# Allegro board pc049a_lemo_db_05.brd
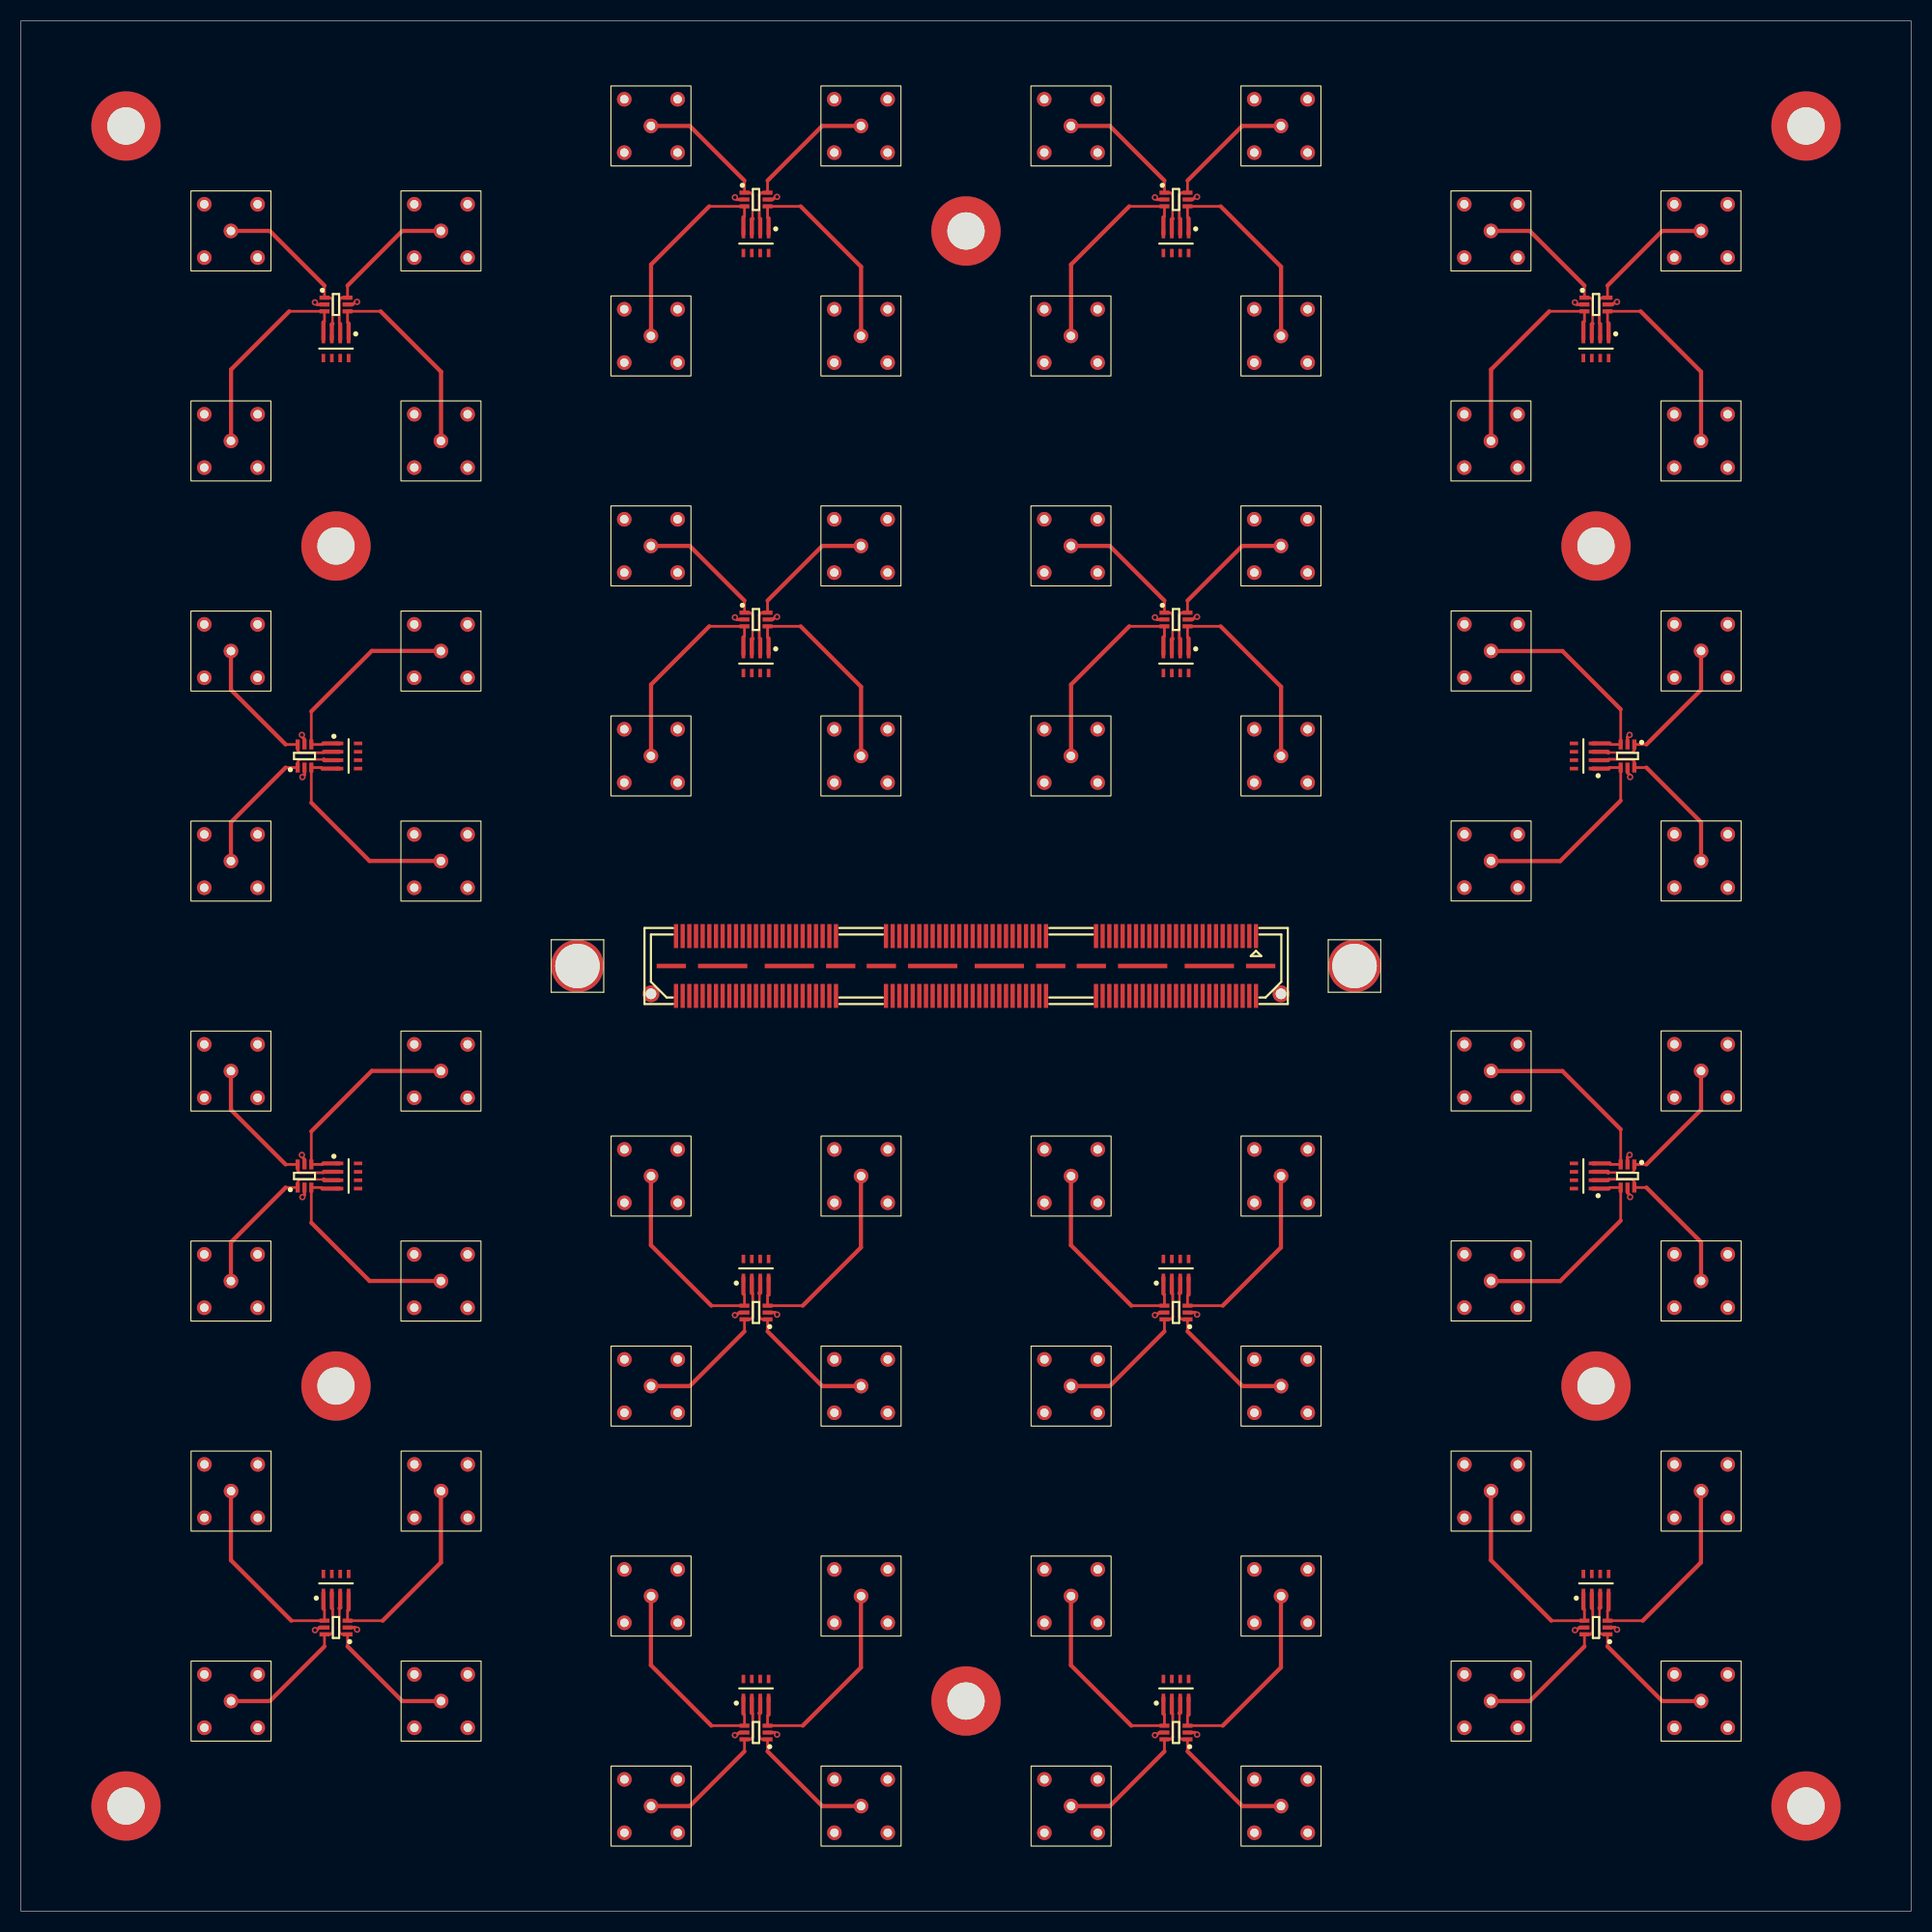
[diagram p0: board, top side]
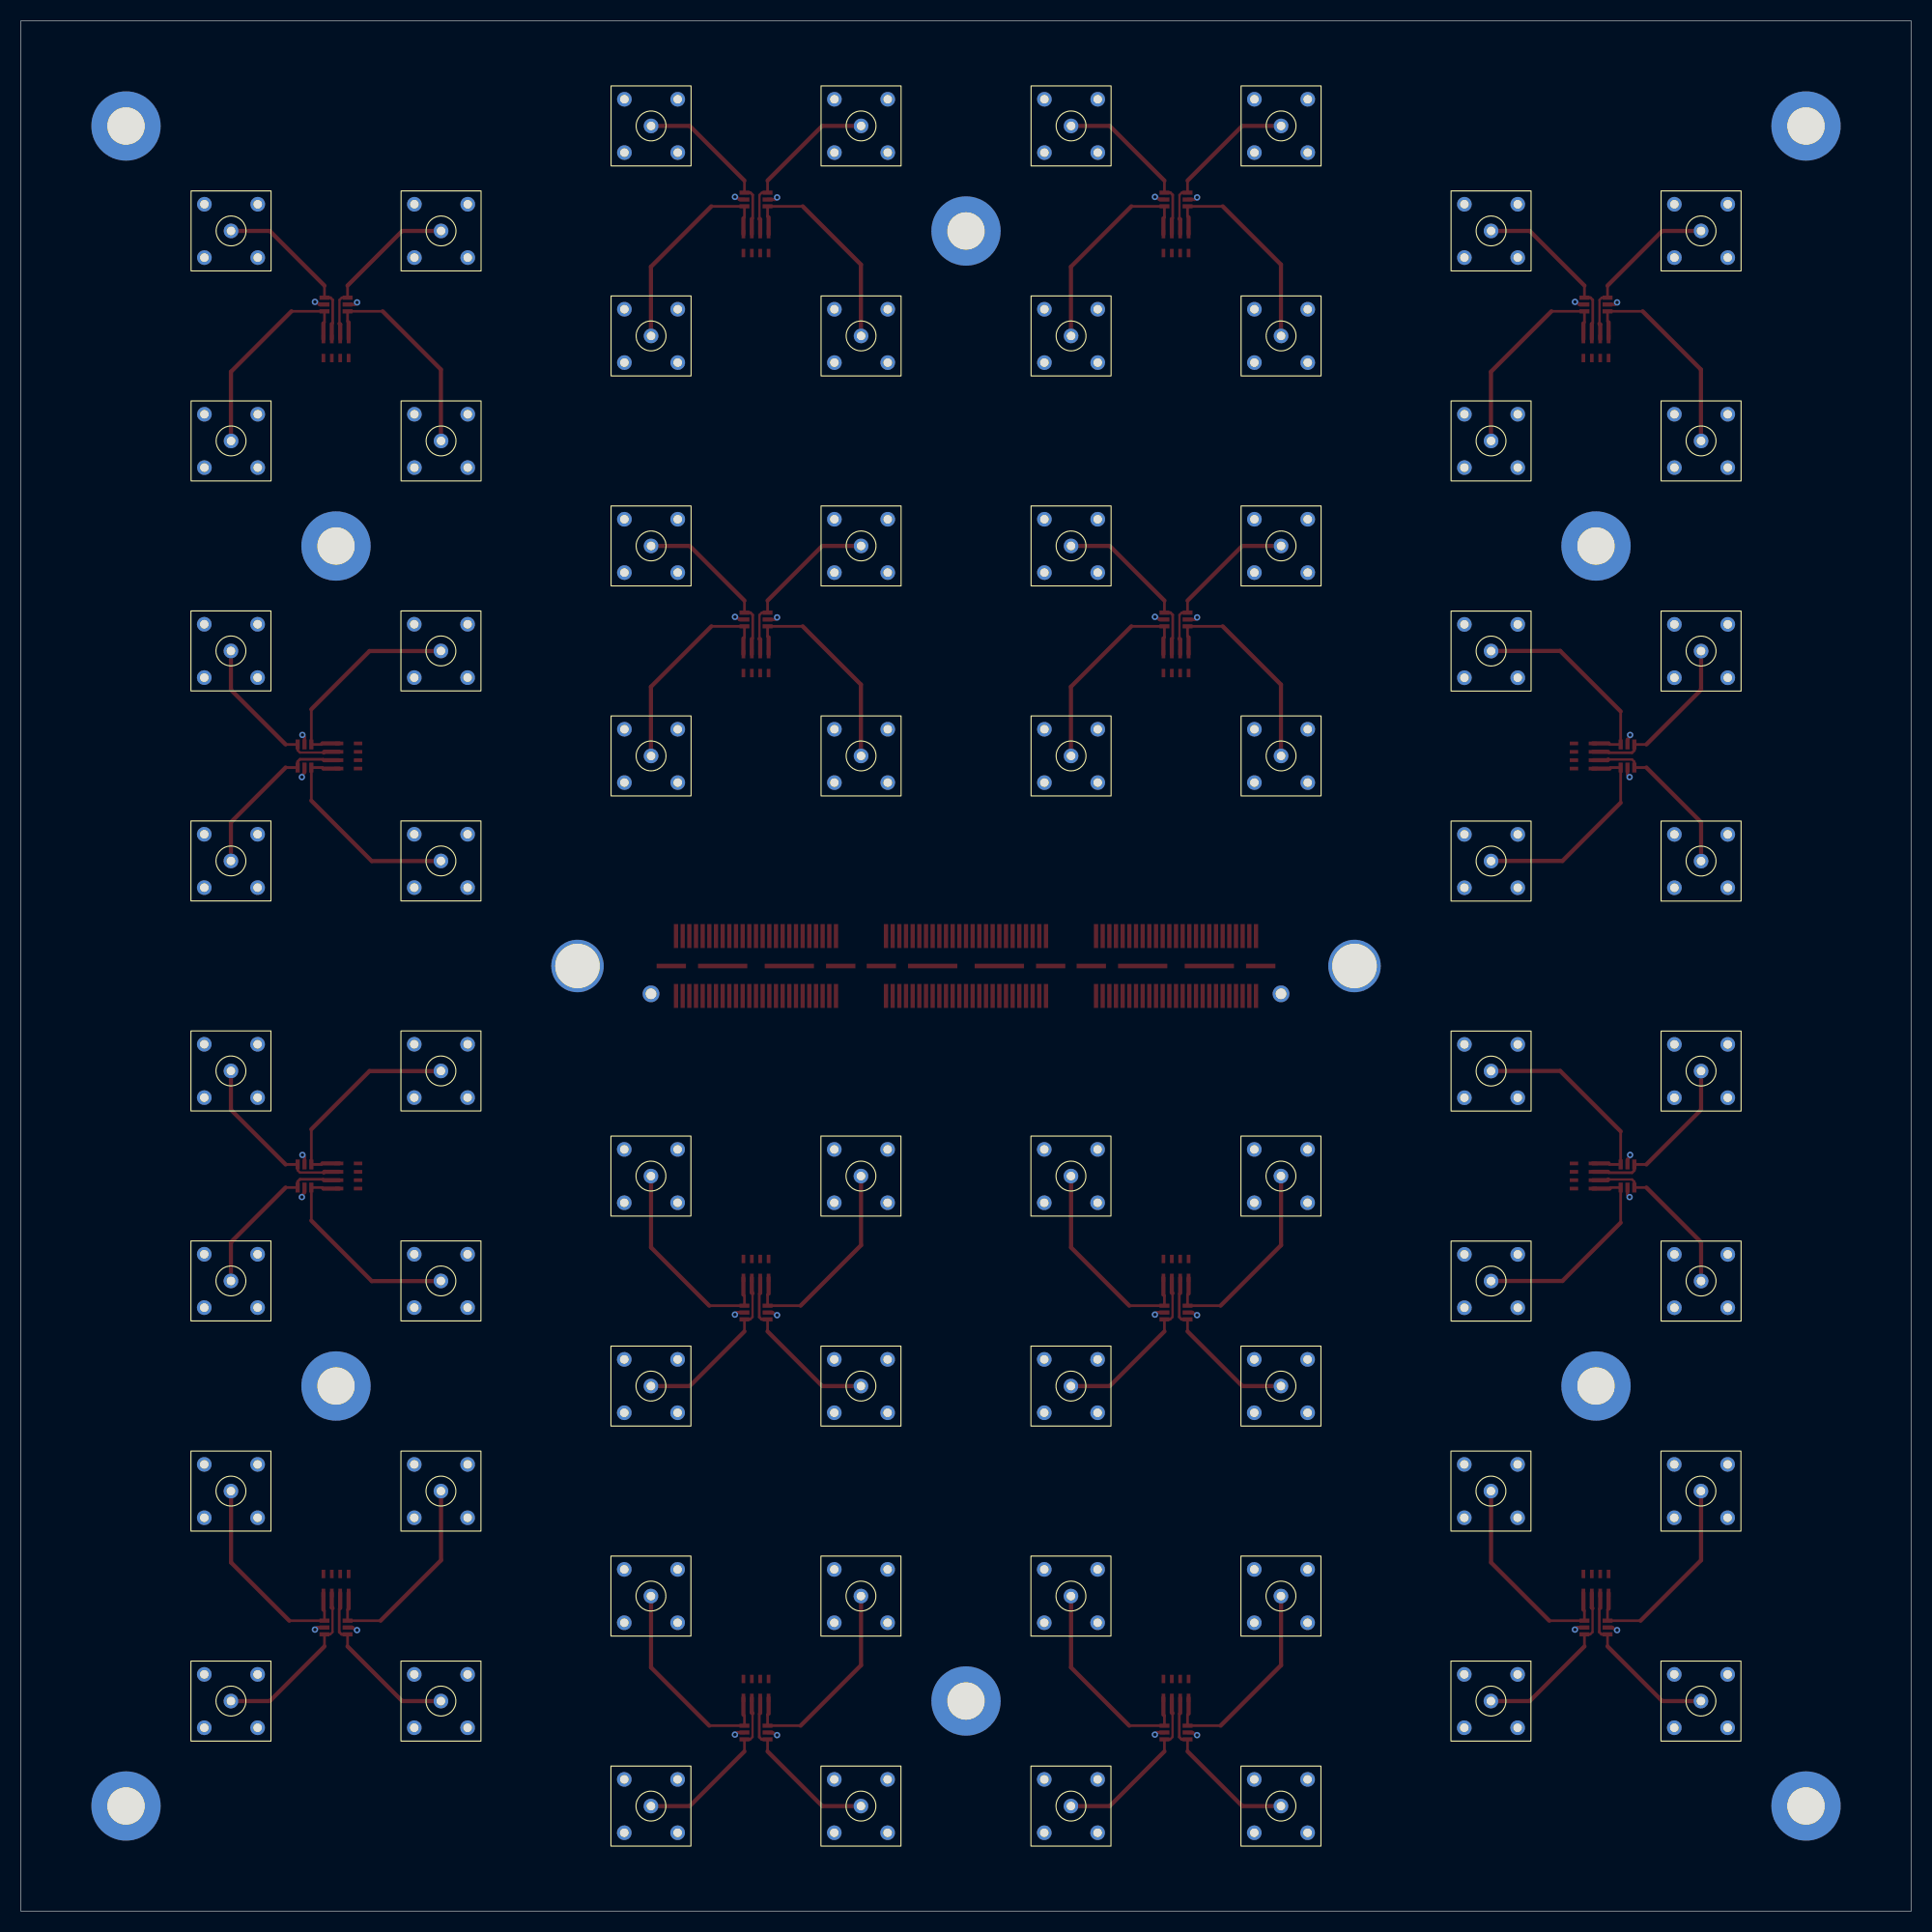
[diagram p1: board, bottom side, seen from below]

Outline 180 x 180 mm; copper layers: TOP, L2, L3, BOTTOM. Coordinates in mm from the lower left corner of the outline.
Outline path: 0,180 180,180 180,0 0,0 0,180

## Design rules (mm)
net group ANALOG_TO_MAROC: nets ANALOG_TO_MAROC<0> ANALOG_TO_MAROC<1> ANALOG_TO_MAROC<2> ANALOG_TO_MAROC<3> ANALOG_TO_MAROC<4> ANALOG_TO_MAROC<5> ANALOG_TO_MAROC<6> ANALOG_TO_MAROC<7> ANALOG_TO_MAROC<8> ANALOG_TO_MAROC<9> ANALOG_TO_MAROC<10> ANALOG_TO_MAROC<11> ANALOG_TO_MAROC<12> ANALOG_TO_MAROC<13> ANALOG_TO_MAROC<14> ANALOG_TO_MAROC<15> ANALOG_TO_MAROC<16> ANALOG_TO_MAROC<17> ANALOG_TO_MAROC<18> ANALOG_TO_MAROC<19> ANALOG_TO_MAROC<20> ANALOG_TO_MAROC<21> ANALOG_TO_MAROC<22> ANALOG_TO_MAROC<23> ANALOG_TO_MAROC<24> ANALOG_TO_MAROC<25> ANALOG_TO_MAROC<26> ANALOG_TO_MAROC<27> ANALOG_TO_MAROC<28> ANALOG_TO_MAROC<29> ANALOG_TO_MAROC<30> ANALOG_TO_MAROC<31> ANALOG_TO_MAROC<32> ANALOG_TO_MAROC<33> ANALOG_TO_MAROC<34> ANALOG_TO_MAROC<35> ANALOG_TO_MAROC<36> ANALOG_TO_MAROC<37> ANALOG_TO_MAROC<38> ANALOG_TO_MAROC<39> ANALOG_TO_MAROC<40> ANALOG_TO_MAROC<41> ANALOG_TO_MAROC<42> ANALOG_TO_MAROC<43> ANALOG_TO_MAROC<44> ANALOG_TO_MAROC<45> ANALOG_TO_MAROC<46> ANALOG_TO_MAROC<47> ANALOG_TO_MAROC<48> ANALOG_TO_MAROC<49> ANALOG_TO_MAROC<50> ANALOG_TO_MAROC<51> ANALOG_TO_MAROC<52> ANALOG_TO_MAROC<53> ANALOG_TO_MAROC<54> ANALOG_TO_MAROC<55> ANALOG_TO_MAROC<56> ANALOG_TO_MAROC<57> ANALOG_TO_MAROC<58> ANALOG_TO_MAROC<59> ANALOG_TO_MAROC<60> ANALOG_TO_MAROC<61> ANALOG_TO_MAROC<62> ANALOG_TO_MAROC<63>

## Placement (name value [footprint] x y rotation side)
CN1_1  100nF/16V  [CAPCAF80P160X320X110-8N]  31.2 70 0 top
CN1_2  100nF/16V  [CAPCAF80P160X320X110-8N]  30 31.2 90 top
CN1_3  100nF/16V  [CAPCAF80P160X320X110-8N]  70 61.2 90 top
CN1_4  100nF/16V  [CAPCAF80P160X320X110-8N]  70 21.2 90 top
CN1_5  100nF/16V  [CAPCAF80P160X320X110-8N]  110 21.2 90 top
CN1_6  100nF/16V  [CAPCAF80P160X320X110-8N]  110 61.2 90 top
CN1_7  100nF/16V  [CAPCAF80P160X320X110-8N]  148.8 70 180 top
CN1_8  100nF/16V  [CAPCAF80P160X320X110-8N]  150 31.2 90 top
CN1_9  100nF/16V  [CAPCAF80P160X320X110-8N]  148.8 110 180 top
CN1_10  100nF/16V  [CAPCAF80P160X320X110-8N]  150 148.8 270 top
CN1_11  100nF/16V  [CAPCAF80P160X320X110-8N]  110 158.8 270 top
CN1_12  100nF/16V  [CAPCAF80P160X320X110-8N]  110 118.8 270 top
CN1_13  100nF/16V  [CAPCAF80P160X320X110-8N]  70 158.8 270 top
CN1_14  100nF/16V  [CAPCAF80P160X320X110-8N]  70 118.8 270 top
CN1_15  100nF/16V  [CAPCAF80P160X320X110-8N]  31.2 110 0 top
CN1_16  100nF/16V  [CAPCAF80P160X320X110-8N]  30 148.8 270 top
D1_1  -  [SOT65P210X110-6N]  27 70 90 top
D1_2  -  [SOT65P210X110-6N]  30 27 180 top
D1_3  -  [SOT65P210X110-6N]  70 57 180 top
D1_4  -  [SOT65P210X110-6N]  70 17 180 top
D1_5  -  [SOT65P210X110-6N]  110 17 180 top
D1_6  -  [SOT65P210X110-6N]  110 57 180 top
D1_7  -  [SOT65P210X110-6N]  153 70 270 top
D1_8  -  [SOT65P210X110-6N]  150 27 180 top
D1_9  -  [SOT65P210X110-6N]  153 110 270 top
D1_10  -  [SOT65P210X110-6N]  150 153 0 top
D1_11  -  [SOT65P210X110-6N]  110 163 0 top
D1_12  -  [SOT65P210X110-6N]  110 123 0 top
D1_13  -  [SOT65P210X110-6N]  70 163 0 top
D1_14  -  [SOT65P210X110-6N]  70 123 0 top
D1_15  -  [SOT65P210X110-6N]  27 110 90 top
D1_16  -  [SOT65P210X110-6N]  30 153 0 top
J1  -  [CON150_QSSDA]  117.62 92.85 270 top
LK*  -  [unnamed]  53 90 0 top
LK*#2  -  [unnamed]  127 90 0 top
NOREF  -  [unnamed#2]  170 10 0 top
NOREF#2  -  [#3]  0 0 90 top
NOREF#3  -  [unnamed#2]  90 160 0 top
NOREF#4  -  [unnamed#2]  150 50 0 top
NOREF#5  -  [unnamed#2]  30 130 0 top
NOREF#6  -  [unnamed#2]  90 20 0 top
NOREF#7  -  [#3]  0 180 0 top
NOREF#8  -  [unnamed#2]  170 170 0 top
NOREF#9  -  [#3]  -130 -130 0 top
NOREF#10  -  [unnamed#2]  150 130 0 top
NOREF#11  -  [unnamed#2]  10 10 0 top
NOREF#12  -  [unnamed#2]  10 170 0 top
NOREF#13  -  [unnamed#2]  30 50 0 top
PX1_1  -  [PLEMOD80]  40 60 270 bottom
PX1_2  -  [PLEMOD80]  40 40 0 bottom
PX1_3  -  [PLEMOD80]  80 70 0 bottom
PX1_4  -  [PLEMOD80]  80 30 0 bottom
PX1_5  -  [PLEMOD80]  120 30 0 bottom
PX1_6  -  [PLEMOD80]  120 70 0 bottom
PX1_7  -  [PLEMOD80]  140 80 90 bottom
PX1_8  -  [PLEMOD80]  160 40 0 bottom
PX1_9  -  [PLEMOD80]  140 120 90 bottom
PX1_10  -  [PLEMOD80]  140 140 180 bottom
PX1_11  -  [PLEMOD80]  100 150 180 bottom
PX1_12  -  [PLEMOD80]  100 110 180 bottom
PX1_13  -  [PLEMOD80]  60 150 180 bottom
PX1_14  -  [PLEMOD80]  60 110 180 bottom
PX1_15  -  [PLEMOD80]  40 100 270 bottom
PX1_16  -  [PLEMOD80]  20 140 180 bottom
PX2_1  -  [PLEMOD80]  20 60 270 bottom
PX2_2  -  [PLEMOD80]  40 20 0 bottom
PX2_3  -  [PLEMOD80]  80 50 0 bottom
PX2_4  -  [PLEMOD80]  80 10 0 bottom
PX2_5  -  [PLEMOD80]  120 10 0 bottom
PX2_6  -  [PLEMOD80]  120 50 0 bottom
PX2_7  -  [PLEMOD80]  160 80 90 bottom
PX2_8  -  [PLEMOD80]  160 20 0 bottom
PX2_9  -  [PLEMOD80]  160 120 90 bottom
PX2_10  -  [PLEMOD80]  140 160 180 bottom
PX2_11  -  [PLEMOD80]  100 170 180 bottom
PX2_12  -  [PLEMOD80]  100 130 180 bottom
PX2_13  -  [PLEMOD80]  60 170 180 bottom
PX2_14  -  [PLEMOD80]  60 130 180 bottom
PX2_15  -  [PLEMOD80]  20 100 270 bottom
PX2_16  -  [PLEMOD80]  20 160 180 bottom
PX3_1  -  [PLEMOD80]  20 80 270 bottom
PX3_2  -  [PLEMOD80]  20 20 0 bottom
PX3_3  -  [PLEMOD80]  60 50 0 bottom
PX3_4  -  [PLEMOD80]  60 10 0 bottom
PX3_5  -  [PLEMOD80]  100 10 0 bottom
PX3_6  -  [PLEMOD80]  100 50 0 bottom
PX3_7  -  [PLEMOD80]  160 60 90 bottom
PX3_8  -  [PLEMOD80]  140 20 0 bottom
PX3_9  -  [PLEMOD80]  160 100 90 bottom
PX3_10  -  [PLEMOD80]  160 160 180 bottom
PX3_11  -  [PLEMOD80]  120 170 180 bottom
PX3_12  -  [PLEMOD80]  120 130 180 bottom
PX3_13  -  [PLEMOD80]  80 170 180 bottom
PX3_14  -  [PLEMOD80]  80 130 180 bottom
PX3_15  -  [PLEMOD80]  20 120 270 bottom
PX3_16  -  [PLEMOD80]  40 160 180 bottom
PX4_1  -  [PLEMOD80]  40 80 270 bottom
PX4_2  -  [PLEMOD80]  20 40 0 bottom
PX4_3  -  [PLEMOD80]  60 70 0 bottom
PX4_4  -  [PLEMOD80]  60 30 0 bottom
PX4_5  -  [PLEMOD80]  100 30 0 bottom
PX4_6  -  [PLEMOD80]  100 70 0 bottom
PX4_7  -  [PLEMOD80]  140 60 90 bottom
PX4_8  -  [PLEMOD80]  140 40 0 bottom
PX4_9  -  [PLEMOD80]  140 100 90 bottom
PX4_10  -  [PLEMOD80]  160 140 180 bottom
PX4_11  -  [PLEMOD80]  120 150 180 bottom
PX4_12  -  [PLEMOD80]  120 110 180 bottom
PX4_13  -  [PLEMOD80]  80 150 180 bottom
PX4_14  -  [PLEMOD80]  80 110 180 bottom
PX4_15  -  [PLEMOD80]  40 120 270 bottom
PX4_16  -  [PLEMOD80]  40 140 180 bottom

## Library data of the parts
CN1_1-CN1_16 = CAPN4I: part number: CAPN4I-100NF,16V,X7R,CKCA43
D1_1-D1_16 = PRTR5V0U4Y
J1 = CON150P: part number: CON150P-QSS75_01FDA
PX1_1-PX1_16 PX2_1-PX2_16 PX3_1-PX3_16 PX4_1-PX4_16 = COAX: part number: COAX-PLEMO00D

## Footprints (pads in the part's own frame, mm; a bottom-side part is the same pattern mirrored in y, then rotated)
CAPCAF80P160X320X110-8N
  rect 0.8x0.35 smd: 1(-0.9,1.2) 2(0.9,1.2) 3(-0.9,0.4) 4(0.9,0.4) 5(-0.9,-0.4) 6(0.9,-0.4) 7(-0.9,-1.2) 8(0.9,-1.2)
CON150_QSSDA
  round 1.6 hole 1.016: (5.5,2.38) (5.5,-57.62)
  rect 2.286x0.406 smd: 1(0,0) 2(5.7,0) 3(0,-0.635) 4(5.7,-0.635) 5(0,-1.27) 6(5.7,-1.27) 7(0,-1.905) 8(5.7,-1.905) 9(0,-2.54) 10(5.7,-2.54) 11(0,-3.175) 12(5.7,-3.175) 13(0,-3.81) 14(5.7,-3.81) 15(0,-4.445) 16(5.7,-4.445) 17(0,-5.08) 18(5.7,-5.08) 19(0,-5.715) 20(5.7,-5.715) 21(0,-6.35) 22(5.7,-6.35) 23(0,-6.985) 24(5.7,-6.985) 25(0,-7.62) 26(5.7,-7.62) 27(0,-8.255) 28(5.7,-8.255) 29(0,-8.89) 30(5.7,-8.89) 31(0,-9.525) 32(5.7,-9.525) 33(0,-10.16) 34(5.7,-10.16) 35(0,-10.795) 36(5.7,-10.795) 37(0,-11.43) 38(5.7,-11.43) 39(0,-12.065) 40(5.7,-12.065) 41(0,-12.7) 42(5.7,-12.7) 43(0,-13.335) 44(5.7,-13.335) 45(0,-13.97) 46(5.7,-13.97) 47(0,-14.605) 48(5.7,-14.605) 49(0,-15.24) 50(5.7,-15.24) 51(0,-20) 52(5.7,-20) 53(0,-20.635) 54(5.7,-20.635) 55(0,-21.27) 56(5.7,-21.27) 57(0,-21.905) 58(5.7,-21.905) 59(0,-22.54) 60(5.7,-22.54) 61(0,-23.175) 62(5.7,-23.175) 63(0,-23.81) 64(5.7,-23.81) 65(0,-24.445) 66(5.7,-24.445) 67(0,-25.08) 68(5.7,-25.08) 69(0,-25.715) 70(5.7,-25.715) 71(0,-26.35) 72(5.7,-26.35) 73(0,-26.985) 74(5.7,-26.985) 75(0,-27.62) 76(5.7,-27.62) 77(0,-28.255) 78(5.7,-28.255) 79(0,-28.89) 80(5.7,-28.89) 81(0,-29.525) 82(5.7,-29.525) 83(0,-30.16) 84(5.7,-30.16) 85(0,-30.795) 86(5.7,-30.795) 87(0,-31.43) 88(5.7,-31.43) 89(0,-32.065) 90(5.7,-32.065) 91(0,-32.7) 92(5.7,-32.7) 93(0,-33.335) 94(5.7,-33.335) 95(0,-33.97) 96(5.7,-33.97) 97(0,-34.605) 98(5.7,-34.605) 99(0,-35.24) 100(5.7,-35.24) 101(0,-40) 102(5.7,-40) 103(0,-40.635) 104(5.7,-40.635) 105(0,-41.27) 106(5.7,-41.27) 107(0,-41.905) 108(5.7,-41.905) 109(0,-42.54) 110(5.7,-42.54) 111(0,-43.175) 112(5.7,-43.175) 113(0,-43.81) 114(5.7,-43.81) 115(0,-44.445) 116(5.7,-44.445) 117(0,-45.08) 118(5.7,-45.08) 119(0,-45.715) 120(5.7,-45.715) 121(0,-46.35) 122(5.7,-46.35) 123(0,-46.985) 124(5.7,-46.985) 125(0,-47.62) 126(5.7,-47.62) 127(0,-48.255) 128(5.7,-48.255) 129(0,-48.89) 130(5.7,-48.89) 131(0,-49.525) 132(5.7,-49.525) 133(0,-50.16) 134(5.7,-50.16) 135(0,-50.795) 136(5.7,-50.795) 137(0,-51.43) 138(5.7,-51.43) 139(0,-52.065) 140(5.7,-52.065) 141(0,-52.7) 142(5.7,-52.7) 143(0,-53.335) 144(5.7,-53.335) 145(0,-53.97) 146(5.7,-53.97) 147(0,-54.605) 148(5.7,-54.605) 149(0,-55.24) 150(5.7,-55.24)
  rect 0.432x2.794 smd: 151(2.85,0.445) 154(2.85,-15.685) 155(2.85,-19.555) 158(2.85,-35.685) 159(2.85,-39.555) 162(2.85,-55.685)
  rect 0.432x4.699 smd: 152(2.85,-4.445) 153(2.85,-10.795) 156(2.85,-24.445) 157(2.85,-30.795) 160(2.85,-44.445) 161(2.85,-50.795)
PLEMOD80
  round 1.397 hole 0.813: 1(0.006,0.007) 2(-2.534,-2.533) 3(2.546,-2.533) 4(2.546,2.547) 5(-2.534,2.547)
SOT65P210X110-6N
  rect 0.95x0.4 smd: 1(-1.1,0.65) 2(-1.1,0) 3(-1.1,-0.65) 4(1.1,-0.65) 5(1.1,0) 6(1.1,0.65)
unnamed
  round 5 hole 4.24 unplated: (0,0)
unnamed#2
  round 6.604 hole 3.556: 1(0,0)

## Nets
AVDD: J1.147(A<146>) J1.148(A<147>) J1.149(A<148>) J1.150(A<149>)
GND_SIGNAL: D1_1.2(GND) D1_1.5(VCC) D1_2.2(GND) D1_2.5(VCC) D1_3.2(GND) D1_3.5(VCC) D1_4.2(GND) D1_4.5(VCC) D1_5.2(GND) D1_5.5(VCC) D1_6.2(GND) D1_6.5(VCC) D1_7.2(GND) D1_7.5(VCC) D1_8.2(GND) D1_8.5(VCC) D1_9.2(GND) D1_9.5(VCC) D1_10.2(GND) D1_10.5(VCC) D1_11.2(GND) D1_11.5(VCC) D1_12.2(GND) D1_12.5(VCC) D1_13.2(GND) D1_13.5(VCC) D1_14.2(GND) D1_14.5(VCC) D1_15.2(GND) D1_15.5(VCC) D1_16.2(GND) D1_16.5(VCC) J1.1(A<0>) J1.4(A<3>) J1.5(A<4>) J1.8(A<7>) J1.9(A<8>) J1.12(A<11>) J1.13(A<12>) J1.16(A<15>) J1.17(A<16>) J1.20(A<19>) J1.21(A<20>) J1.24(A<23>) J1.25(A<24>) J1.28(A<27>) J1.29(A<28>) J1.32(A<31>) J1.33(A<32>) J1.36(A<35>) J1.37(A<36>) J1.40(A<39>) J1.41(A<40>) J1.44(A<43>) J1.45(A<44>) J1.48(A<47>) J1.49(A<48>) J1.52(A<51>) J1.53(A<52>) J1.56(A<55>) J1.57(A<56>) J1.60(A<59>) J1.61(A<60>) J1.64(A<63>) J1.65(A<64>) J1.68(A<67>) J1.69(A<68>) J1.72(A<71>) J1.73(A<72>) J1.76(A<75>) J1.77(A<76>) J1.80(A<79>) J1.81(A<80>) J1.84(A<83>) J1.85(A<84>) J1.88(A<87>) J1.89(A<88>) J1.92(A<91>) J1.93(A<92>) J1.96(A<95>) J1.97(A<96>) J1.100(A<99>) J1.101(A<100>) J1.104(A<103>) J1.105(A<104>) J1.108(A<107>) J1.109(A<108>) J1.112(A<111>) J1.113(A<112>) J1.116(A<115>) J1.117(A<116>) J1.120(A<119>) J1.121(A<120>) J1.124(A<123>) J1.125(A<124>) J1.128(A<127>) J1.129(A<128>) J1.132(A<131>) J1.133(A<132>) J1.136(A<135>) J1.137(A<136>) J1.140(A<139>) J1.141(A<140>) J1.144(A<143>) J1.145(A<144>) J1.146(A<145>) PX1_1.2(B<0>) PX1_1.3(B<1>) PX1_1.4(B<2>) PX1_1.5(B<3>) PX1_2.2(B<0>) PX1_2.3(B<1>) PX1_2.4(B<2>) PX1_2.5(B<3>) PX1_3.2(B<0>) PX1_3.3(B<1>) PX1_3.4(B<2>) PX1_3.5(B<3>) PX1_4.2(B<0>) PX1_4.3(B<1>) PX1_4.4(B<2>) PX1_4.5(B<3>) PX1_5.2(B<0>) PX1_5.3(B<1>) PX1_5.4(B<2>) PX1_5.5(B<3>) PX1_6.2(B<0>) PX1_6.3(B<1>) PX1_6.4(B<2>) PX1_6.5(B<3>) PX1_7.2(B<0>) PX1_7.3(B<1>) PX1_7.4(B<2>) PX1_7.5(B<3>) PX1_8.2(B<0>) PX1_8.3(B<1>) PX1_8.4(B<2>) PX1_8.5(B<3>) PX1_9.2(B<0>) PX1_9.3(B<1>) PX1_9.4(B<2>) PX1_9.5(B<3>) PX1_10.2(B<0>) PX1_10.3(B<1>) PX1_10.4(B<2>) PX1_10.5(B<3>) PX1_11.2(B<0>) PX1_11.3(B<1>) PX1_11.4(B<2>) PX1_11.5(B<3>) PX1_12.2(B<0>) PX1_12.3(B<1>) PX1_12.4(B<2>) PX1_12.5(B<3>) PX1_13.2(B<0>) PX1_13.3(B<1>) PX1_13.4(B<2>) PX1_13.5(B<3>) PX1_14.2(B<0>) PX1_14.3(B<1>) PX1_14.4(B<2>) PX1_14.5(B<3>) PX1_15.2(B<0>) PX1_15.3(B<1>) PX1_15.4(B<2>) PX1_15.5(B<3>) PX1_16.2(B<0>) PX1_16.3(B<1>) PX1_16.4(B<2>) PX1_16.5(B<3>) PX2_1.2(B<0>) PX2_1.3(B<1>) PX2_1.4(B<2>) PX2_1.5(B<3>) PX2_2.2(B<0>) PX2_2.3(B<1>) PX2_2.4(B<2>) PX2_2.5(B<3>) PX2_3.2(B<0>) PX2_3.3(B<1>) PX2_3.4(B<2>) PX2_3.5(B<3>) PX2_4.2(B<0>) PX2_4.3(B<1>) PX2_4.4(B<2>) PX2_4.5(B<3>) PX2_5.2(B<0>) PX2_5.3(B<1>) PX2_5.4(B<2>) PX2_5.5(B<3>) PX2_6.2(B<0>) PX2_6.3(B<1>) PX2_6.4(B<2>) PX2_6.5(B<3>) PX2_7.2(B<0>) PX2_7.3(B<1>) PX2_7.4(B<2>) PX2_7.5(B<3>) PX2_8.2(B<0>) PX2_8.3(B<1>) PX2_8.4(B<2>) PX2_8.5(B<3>) PX2_9.2(B<0>) PX2_9.3(B<1>) PX2_9.4(B<2>) PX2_9.5(B<3>) PX2_10.2(B<0>) PX2_10.3(B<1>) PX2_10.4(B<2>) PX2_10.5(B<3>) PX2_11.2(B<0>) PX2_11.3(B<1>) PX2_11.4(B<2>) PX2_11.5(B<3>) PX2_12.2(B<0>) PX2_12.3(B<1>) PX2_12.4(B<2>) PX2_12.5(B<3>) PX2_13.2(B<0>) PX2_13.3(B<1>) PX2_13.4(B<2>) PX2_13.5(B<3>) PX2_14.2(B<0>) PX2_14.3(B<1>) PX2_14.4(B<2>) PX2_14.5(B<3>) PX2_15.2(B<0>) PX2_15.3(B<1>) PX2_15.4(B<2>) PX2_15.5(B<3>) PX2_16.2(B<0>) PX2_16.3(B<1>) PX2_16.4(B<2>) PX2_16.5(B<3>) PX3_1.2(B<0>) PX3_1.3(B<1>) PX3_1.4(B<2>) PX3_1.5(B<3>) PX3_2.2(B<0>) PX3_2.3(B<1>) PX3_2.4(B<2>) PX3_2.5(B<3>) PX3_3.2(B<0>) PX3_3.3(B<1>) PX3_3.4(B<2>) PX3_3.5(B<3>) PX3_4.2(B<0>) PX3_4.3(B<1>) PX3_4.4(B<2>) PX3_4.5(B<3>) PX3_5.2(B<0>) PX3_5.3(B<1>) PX3_5.4(B<2>) PX3_5.5(B<3>) PX3_6.2(B<0>) PX3_6.3(B<1>) PX3_6.4(B<2>) PX3_6.5(B<3>) PX3_7.2(B<0>) PX3_7.3(B<1>) PX3_7.4(B<2>) PX3_7.5(B<3>) PX3_8.2(B<0>) PX3_8.3(B<1>) PX3_8.4(B<2>) PX3_8.5(B<3>) PX3_9.2(B<0>) PX3_9.3(B<1>) PX3_9.4(B<2>) PX3_9.5(B<3>) PX3_10.2(B<0>) PX3_10.3(B<1>) PX3_10.4(B<2>) PX3_10.5(B<3>) PX3_11.2(B<0>) PX3_11.3(B<1>) PX3_11.4(B<2>) PX3_11.5(B<3>) PX3_12.2(B<0>) PX3_12.3(B<1>) PX3_12.4(B<2>) PX3_12.5(B<3>) PX3_13.2(B<0>) PX3_13.3(B<1>) PX3_13.4(B<2>) PX3_13.5(B<3>) PX3_14.2(B<0>) PX3_14.3(B<1>) PX3_14.4(B<2>) PX3_14.5(B<3>) PX3_15.2(B<0>) PX3_15.3(B<1>) PX3_15.4(B<2>) PX3_15.5(B<3>) PX3_16.2(B<0>) PX3_16.3(B<1>) PX3_16.4(B<2>) PX3_16.5(B<3>) PX4_1.2(B<0>) PX4_1.3(B<1>) PX4_1.4(B<2>) PX4_1.5(B<3>) PX4_2.2(B<0>) PX4_2.3(B<1>) PX4_2.4(B<2>) PX4_2.5(B<3>) PX4_3.2(B<0>) PX4_3.3(B<1>) PX4_3.4(B<2>) PX4_3.5(B<3>) PX4_4.2(B<0>) PX4_4.3(B<1>) PX4_4.4(B<2>) PX4_4.5(B<3>) PX4_5.2(B<0>) PX4_5.3(B<1>) PX4_5.4(B<2>) PX4_5.5(B<3>) PX4_6.2(B<0>) PX4_6.3(B<1>) PX4_6.4(B<2>) PX4_6.5(B<3>) PX4_7.2(B<0>) PX4_7.3(B<1>) PX4_7.4(B<2>) PX4_7.5(B<3>) PX4_8.2(B<0>) PX4_8.3(B<1>) PX4_8.4(B<2>) PX4_8.5(B<3>) PX4_9.2(B<0>) PX4_9.3(B<1>) PX4_9.4(B<2>) PX4_9.5(B<3>) PX4_10.2(B<0>) PX4_10.3(B<1>) PX4_10.4(B<2>) PX4_10.5(B<3>) PX4_11.2(B<0>) PX4_11.3(B<1>) PX4_11.4(B<2>) PX4_11.5(B<3>) PX4_12.2(B<0>) PX4_12.3(B<1>) PX4_12.4(B<2>) PX4_12.5(B<3>) PX4_13.2(B<0>) PX4_13.3(B<1>) PX4_13.4(B<2>) PX4_13.5(B<3>) PX4_14.2(B<0>) PX4_14.3(B<1>) PX4_14.4(B<2>) PX4_14.5(B<3>) PX4_15.2(B<0>) PX4_15.3(B<1>) PX4_15.4(B<2>) PX4_15.5(B<3>) PX4_16.2(B<0>) PX4_16.3(B<1>) PX4_16.4(B<2>) PX4_16.5(B<3>)
ANALOG_TO_MAROC<0>: CN1_7.8(B<0>) J1.2(A<1>)
ANALOG_TO_MAROC<1>: CN1_9.2(B<0>) J1.3(A<2>)
ANALOG_TO_MAROC<2>: CN1_7.6(B<0>) J1.6(A<5>)
ANALOG_TO_MAROC<3>: CN1_9.4(B<0>) J1.7(A<6>)
ANALOG_TO_MAROC<4>: CN1_7.4(B<0>) J1.10(A<9>)
ANALOG_TO_MAROC<5>: CN1_9.6(B<0>) J1.11(A<10>)
ANALOG_TO_MAROC<6>: CN1_7.2(B<0>) J1.14(A<13>)
ANALOG_TO_MAROC<7>: CN1_9.8(B<0>) J1.15(A<14>)
ANALOG_TO_MAROC<8>: CN1_8.8(B<0>) J1.18(A<17>)
ANALOG_TO_MAROC<9>: CN1_10.2(B<0>) J1.19(A<18>)
ANALOG_TO_MAROC<10>: CN1_8.6(B<0>) J1.22(A<21>)
ANALOG_TO_MAROC<11>: CN1_10.4(B<0>) J1.23(A<22>)
ANALOG_TO_MAROC<12>: CN1_8.4(B<0>) J1.26(A<25>)
ANALOG_TO_MAROC<13>: CN1_10.6(B<0>) J1.27(A<26>)
ANALOG_TO_MAROC<14>: CN1_8.2(B<0>) J1.30(A<29>)
ANALOG_TO_MAROC<15>: CN1_10.8(B<0>) J1.31(A<30>)
ANALOG_TO_MAROC<16>: CN1_6.8(B<0>) J1.34(A<33>)
ANALOG_TO_MAROC<17>: CN1_12.2(B<0>) J1.35(A<34>)
ANALOG_TO_MAROC<18>: CN1_6.6(B<0>) J1.38(A<37>)
ANALOG_TO_MAROC<19>: CN1_12.4(B<0>) J1.39(A<38>)
ANALOG_TO_MAROC<20>: CN1_6.4(B<0>) J1.42(A<41>)
ANALOG_TO_MAROC<21>: CN1_12.6(B<0>) J1.43(A<42>)
ANALOG_TO_MAROC<22>: CN1_6.2(B<0>) J1.46(A<45>)
ANALOG_TO_MAROC<23>: CN1_12.8(B<0>) J1.47(A<46>)
ANALOG_TO_MAROC<24>: CN1_5.8(B<0>) J1.50(A<49>)
ANALOG_TO_MAROC<25>: CN1_11.2(B<0>) J1.51(A<50>)
ANALOG_TO_MAROC<26>: CN1_5.6(B<0>) J1.54(A<53>)
ANALOG_TO_MAROC<27>: CN1_11.4(B<0>) J1.55(A<54>)
ANALOG_TO_MAROC<28>: CN1_5.4(B<0>) J1.58(A<57>)
ANALOG_TO_MAROC<29>: CN1_11.6(B<0>) J1.59(A<58>)
ANALOG_TO_MAROC<30>: CN1_5.2(B<0>) J1.62(A<61>)
ANALOG_TO_MAROC<31>: CN1_11.8(B<0>) J1.63(A<62>)
ANALOG_TO_MAROC<32>: CN1_4.8(B<0>) J1.66(A<65>)
ANALOG_TO_MAROC<33>: CN1_13.2(B<0>) J1.67(A<66>)
ANALOG_TO_MAROC<34>: CN1_4.6(B<0>) J1.70(A<69>)
ANALOG_TO_MAROC<35>: CN1_13.4(B<0>) J1.71(A<70>)
ANALOG_TO_MAROC<36>: CN1_4.4(B<0>) J1.74(A<73>)
ANALOG_TO_MAROC<37>: CN1_13.6(B<0>) J1.75(A<74>)
ANALOG_TO_MAROC<38>: CN1_4.2(B<0>) J1.78(A<77>)
ANALOG_TO_MAROC<39>: CN1_13.8(B<0>) J1.79(A<78>)
ANALOG_TO_MAROC<40>: CN1_3.8(B<0>) J1.82(A<81>)
ANALOG_TO_MAROC<41>: CN1_14.2(B<0>) J1.83(A<82>)
ANALOG_TO_MAROC<42>: CN1_3.6(B<0>) J1.86(A<85>)
ANALOG_TO_MAROC<43>: CN1_14.4(B<0>) J1.87(A<86>)
ANALOG_TO_MAROC<44>: CN1_3.4(B<0>) J1.90(A<89>)
ANALOG_TO_MAROC<45>: CN1_14.6(B<0>) J1.91(A<90>)
ANALOG_TO_MAROC<46>: CN1_3.2(B<0>) J1.94(A<93>)
ANALOG_TO_MAROC<47>: CN1_14.8(B<0>) J1.95(A<94>)
ANALOG_TO_MAROC<48>: CN1_2.8(B<0>) J1.98(A<97>)
ANALOG_TO_MAROC<49>: CN1_16.2(B<0>) J1.99(A<98>)
ANALOG_TO_MAROC<50>: CN1_2.6(B<0>) J1.102(A<101>)
ANALOG_TO_MAROC<51>: CN1_16.4(B<0>) J1.103(A<102>)
ANALOG_TO_MAROC<52>: CN1_2.4(B<0>) J1.106(A<105>)
ANALOG_TO_MAROC<53>: CN1_16.6(B<0>) J1.107(A<106>)
ANALOG_TO_MAROC<54>: CN1_2.2(B<0>) J1.110(A<109>)
ANALOG_TO_MAROC<55>: CN1_16.8(B<0>) J1.111(A<110>)
ANALOG_TO_MAROC<56>: CN1_1.8(B<0>) J1.114(A<113>)
ANALOG_TO_MAROC<57>: CN1_15.2(B<0>) J1.115(A<114>)
ANALOG_TO_MAROC<58>: CN1_1.6(B<0>) J1.118(A<117>)
ANALOG_TO_MAROC<59>: CN1_15.4(B<0>) J1.119(A<118>)
ANALOG_TO_MAROC<60>: CN1_1.4(B<0>) J1.122(A<121>)
ANALOG_TO_MAROC<61>: CN1_15.6(B<0>) J1.123(A<122>)
ANALOG_TO_MAROC<62>: CN1_1.2(B<0>) J1.126(A<125>)
ANALOG_TO_MAROC<63>: CN1_15.8(B<0>) J1.127(A<126>)
DBOARD_MISO: J1.131(A<130>)
DBOARD_MISO*: J1.135(A<134>)
DBOARD_MOSI: J1.138(A<137>)
DBOARD_MOSI*: J1.142(A<141>)
DBOARD_SCLK: J1.130(A<129>)
DBOARD_SCLK*: J1.134(A<133>)
DBOARD_SSN: J1.139(A<138>)
DBOARD_SSN*: J1.143(A<142>)
P1: J1.151 J1.152 J1.153 J1.154
P2: J1.155 J1.156 J1.157 J1.158
P3: J1.159 J1.160 J1.161 J1.162
UNNAMED_1_CAPN4I_I10_A_1: CN1_1.1(A<0>) D1_1.4(ESD3) PX4_1.1(A)
UNNAMED_1_CAPN4I_I10_A_1_1: CN1_1.3(A<0>) D1_1.6(ESD4) PX3_1.1(A)
UNNAMED_1_CAPN4I_I10_A_1_2: CN1_2.3(A<0>) D1_2.6(ESD4) PX3_2.1(A)
UNNAMED_1_CAPN4I_I10_A_1_3: CN1_3.3(A<0>) D1_3.6(ESD4) PX3_3.1(A)
UNNAMED_1_CAPN4I_I10_A_1_4: CN1_4.3(A<0>) D1_4.6(ESD4) PX3_4.1(A)
UNNAMED_1_CAPN4I_I10_A_1_5: CN1_5.3(A<0>) D1_5.6(ESD4) PX3_5.1(A)
UNNAMED_1_CAPN4I_I10_A_1_6: CN1_6.3(A<0>) D1_6.6(ESD4) PX3_6.1(A)
UNNAMED_1_CAPN4I_I10_A_1_7: CN1_7.3(A<0>) D1_7.6(ESD4) PX3_7.1(A)
UNNAMED_1_CAPN4I_I10_A_1_8: CN1_8.3(A<0>) D1_8.6(ESD4) PX3_8.1(A)
UNNAMED_1_CAPN4I_I10_A_1_9: CN1_9.3(A<0>) D1_9.6(ESD4) PX3_9.1(A)
UNNAMED_1_CAPN4I_I10_A_1_10: CN1_10.3(A<0>) D1_10.6(ESD4) PX3_10.1(A)
UNNAMED_1_CAPN4I_I10_A_1_11: CN1_11.3(A<0>) D1_11.6(ESD4) PX3_11.1(A)
UNNAMED_1_CAPN4I_I10_A_1_12: CN1_12.3(A<0>) D1_12.6(ESD4) PX3_12.1(A)
UNNAMED_1_CAPN4I_I10_A_1_13: CN1_13.3(A<0>) D1_13.6(ESD4) PX3_13.1(A)
UNNAMED_1_CAPN4I_I10_A_1_14: CN1_14.3(A<0>) D1_14.6(ESD4) PX3_14.1(A)
UNNAMED_1_CAPN4I_I10_A_1_15: CN1_15.3(A<0>) D1_15.6(ESD4) PX3_15.1(A)
UNNAMED_1_CAPN4I_I10_A_1_16: CN1_16.3(A<0>) D1_16.6(ESD4) PX3_16.1(A)
UNNAMED_1_CAPN4I_I10_A_2: CN1_2.1(A<0>) D1_2.4(ESD3) PX4_2.1(A)
UNNAMED_1_CAPN4I_I10_A_2_1: CN1_1.5(A<0>) D1_1.1(ESD1) PX2_1.1(A)
UNNAMED_1_CAPN4I_I10_A_2_2: CN1_2.5(A<0>) D1_2.1(ESD1) PX2_2.1(A)
UNNAMED_1_CAPN4I_I10_A_2_3: CN1_3.5(A<0>) D1_3.1(ESD1) PX2_3.1(A)
UNNAMED_1_CAPN4I_I10_A_2_4: CN1_4.5(A<0>) D1_4.1(ESD1) PX2_4.1(A)
UNNAMED_1_CAPN4I_I10_A_2_5: CN1_5.5(A<0>) D1_5.1(ESD1) PX2_5.1(A)
UNNAMED_1_CAPN4I_I10_A_2_6: CN1_6.5(A<0>) D1_6.1(ESD1) PX2_6.1(A)
UNNAMED_1_CAPN4I_I10_A_2_7: CN1_7.5(A<0>) D1_7.1(ESD1) PX2_7.1(A)
UNNAMED_1_CAPN4I_I10_A_2_8: CN1_8.5(A<0>) D1_8.1(ESD1) PX2_8.1(A)
UNNAMED_1_CAPN4I_I10_A_2_9: CN1_9.5(A<0>) D1_9.1(ESD1) PX2_9.1(A)
UNNAMED_1_CAPN4I_I10_A_2_10: CN1_10.5(A<0>) D1_10.1(ESD1) PX2_10.1(A)
UNNAMED_1_CAPN4I_I10_A_2_11: CN1_11.5(A<0>) D1_11.1(ESD1) PX2_11.1(A)
UNNAMED_1_CAPN4I_I10_A_2_12: CN1_12.5(A<0>) D1_12.1(ESD1) PX2_12.1(A)
UNNAMED_1_CAPN4I_I10_A_2_13: CN1_13.5(A<0>) D1_13.1(ESD1) PX2_13.1(A)
UNNAMED_1_CAPN4I_I10_A_2_14: CN1_14.5(A<0>) D1_14.1(ESD1) PX2_14.1(A)
UNNAMED_1_CAPN4I_I10_A_2_15: CN1_15.5(A<0>) D1_15.1(ESD1) PX2_15.1(A)
UNNAMED_1_CAPN4I_I10_A_2_16: CN1_16.5(A<0>) D1_16.1(ESD1) PX2_16.1(A)
UNNAMED_1_CAPN4I_I10_A_3: CN1_3.1(A<0>) D1_3.4(ESD3) PX4_3.1(A)
UNNAMED_1_CAPN4I_I10_A_3_1: CN1_1.7(A<0>) D1_1.3(ESD2) PX1_1.1(A)
UNNAMED_1_CAPN4I_I10_A_3_2: CN1_2.7(A<0>) D1_2.3(ESD2) PX1_2.1(A)
UNNAMED_1_CAPN4I_I10_A_3_3: CN1_3.7(A<0>) D1_3.3(ESD2) PX1_3.1(A)
UNNAMED_1_CAPN4I_I10_A_3_4: CN1_4.7(A<0>) D1_4.3(ESD2) PX1_4.1(A)
UNNAMED_1_CAPN4I_I10_A_3_5: CN1_5.7(A<0>) D1_5.3(ESD2) PX1_5.1(A)
UNNAMED_1_CAPN4I_I10_A_3_6: CN1_6.7(A<0>) D1_6.3(ESD2) PX1_6.1(A)
UNNAMED_1_CAPN4I_I10_A_3_7: CN1_7.7(A<0>) D1_7.3(ESD2) PX1_7.1(A)
UNNAMED_1_CAPN4I_I10_A_3_8: CN1_8.7(A<0>) D1_8.3(ESD2) PX1_8.1(A)
UNNAMED_1_CAPN4I_I10_A_3_9: CN1_9.7(A<0>) D1_9.3(ESD2) PX1_9.1(A)
UNNAMED_1_CAPN4I_I10_A_3_10: CN1_10.7(A<0>) D1_10.3(ESD2) PX1_10.1(A)
UNNAMED_1_CAPN4I_I10_A_3_11: CN1_11.7(A<0>) D1_11.3(ESD2) PX1_11.1(A)
UNNAMED_1_CAPN4I_I10_A_3_12: CN1_12.7(A<0>) D1_12.3(ESD2) PX1_12.1(A)
UNNAMED_1_CAPN4I_I10_A_3_13: CN1_13.7(A<0>) D1_13.3(ESD2) PX1_13.1(A)
UNNAMED_1_CAPN4I_I10_A_3_14: CN1_14.7(A<0>) D1_14.3(ESD2) PX1_14.1(A)
UNNAMED_1_CAPN4I_I10_A_3_15: CN1_15.7(A<0>) D1_15.3(ESD2) PX1_15.1(A)
UNNAMED_1_CAPN4I_I10_A_3_16: CN1_16.7(A<0>) D1_16.3(ESD2) PX1_16.1(A)
UNNAMED_1_CAPN4I_I10_A_4: CN1_4.1(A<0>) D1_4.4(ESD3) PX4_4.1(A)
UNNAMED_1_CAPN4I_I10_A_5: CN1_5.1(A<0>) D1_5.4(ESD3) PX4_5.1(A)
UNNAMED_1_CAPN4I_I10_A_6: CN1_6.1(A<0>) D1_6.4(ESD3) PX4_6.1(A)
UNNAMED_1_CAPN4I_I10_A_7: CN1_7.1(A<0>) D1_7.4(ESD3) PX4_7.1(A)
UNNAMED_1_CAPN4I_I10_A_8: CN1_8.1(A<0>) D1_8.4(ESD3) PX4_8.1(A)
UNNAMED_1_CAPN4I_I10_A_9: CN1_9.1(A<0>) D1_9.4(ESD3) PX4_9.1(A)
UNNAMED_1_CAPN4I_I10_A_10: CN1_10.1(A<0>) D1_10.4(ESD3) PX4_10.1(A)
UNNAMED_1_CAPN4I_I10_A_11: CN1_11.1(A<0>) D1_11.4(ESD3) PX4_11.1(A)
UNNAMED_1_CAPN4I_I10_A_12: CN1_12.1(A<0>) D1_12.4(ESD3) PX4_12.1(A)
UNNAMED_1_CAPN4I_I10_A_13: CN1_13.1(A<0>) D1_13.4(ESD3) PX4_13.1(A)
UNNAMED_1_CAPN4I_I10_A_14: CN1_14.1(A<0>) D1_14.4(ESD3) PX4_14.1(A)
UNNAMED_1_CAPN4I_I10_A_15: CN1_15.1(A<0>) D1_15.4(ESD3) PX4_15.1(A)
UNNAMED_1_CAPN4I_I10_A_16: CN1_16.1(A<0>) D1_16.4(ESD3) PX4_16.1(A)

Pads without a net: NOREF 1; NOREF#3 1; NOREF#4 1; NOREF#5 1; NOREF#6 1; NOREF#8 1; NOREF#10 1; NOREF#11 1; NOREF#12 1; NOREF#13 1

## Via types
v1: diameter 0.61, hole 0.33, TOP to BOTTOM, 32 vias

## Routing (per net, layer and track width the routed paths; a pad name or vN(x,y) marks a point on that pad's centre or on a via; arc(x,y) is an arc through that point)
GND_SIGNAL: length 32
  TOP w0.3: D1_13.5 71.59,163 71.84,163.25 v1(72,163.25) ; v1(32,153.25) 31.84,153.25 31.59,153 D1_16.5 ; v1(28,26.75) 28.16,26.75 28.41,27 D1_2.5 ; D1_10.2 148.2,153 148,153.2 v1(147.99,153.2) ; v1(72.01,16.8) 72,16.8 71.8,17 D1_4.2 ; D1_12.5 111.59,123 111.84,123.25 v1(112,123.25) ; v1(68,56.75) 68.16,56.75 68.41,57 D1_3.5 ; D1_14.5 71.59,123 71.84,123.25 v1(72,123.25) ; v1(107.99,123.2) 108,123.2 108.2,123 D1_12.2 ; D1_15.2 27,108.2 26.8,108 v1(26.8,107.99) ; D1_1.2 27,68.2 26.8,68 v1(26.8,67.99) ; v1(67.99,163.2) 68,163.2 68.2,163 D1_13.2 ; v1(68,16.75) 68.16,16.75 68.41,17 D1_4.5 ; D1_3.2 71.8,57 72,56.8 v1(72.01,56.8) ; D1_8.5 148.41,27 148.16,26.75 v1(148,26.75) ; D1_5.5 108.41,17 108.16,16.75 v1(108,16.75) ; v1(108,56.75) 108.16,56.75 108.41,57 D1_6.5 ; v1(152,153.25) 151.84,153.25 151.59,153 D1_10.5 ; D1_11.5 111.59,163 111.84,163.25 v1(112,163.25) ; v1(112.01,16.8) 112,16.8 111.8,17 D1_5.2 ; D1_11.2 108.2,163 108,163.2 v1(107.99,163.2) ; v1(27.99,153.2) 28,153.2 28.2,153 D1_16.2 ; D1_15.5 27,111.59 26.75,111.84 v1(26.75,112) ; v1(32.01,26.8) 32,26.8 31.8,27 D1_2.2 ; v1(153.25,108) 153.25,108.16 153,108.41 D1_9.5 ; v1(153.2,72.01) 153.2,72 153,71.8 D1_7.2 ; D1_7.5 153,68.41 153.25,68.16 v1(153.25,68) ; D1_9.2 153,111.8 153.2,112 v1(153.2,112.01) ; D1_1.5 27,71.59 26.75,71.84 v1(26.75,72) ; D1_6.2 111.8,57 112,56.8 v1(112.01,56.8) ; D1_14.2 68.2,123 68,123.2 v1(67.99,123.2) ; D1_8.2 151.8,27 152,26.8 v1(152.01,26.8)
UNNAMED_1_CAPN4I_I10_A_1: length 20.6
  TOP w0.226: PX4_1.1 39.99,80.01
  TOP w0.26: 28.8,71.2 28.7,71.1 D1_1.4 27.65,74.25
  TOP w0.4: 27.65,74.25 33.41,80.01 39.99,80.01 ; CN1_1.1 28.8,71.2
UNNAMED_1_CAPN4I_I10_A_1_1: length 16.9
  TOP w0.226: 26.35,70.65 D1_1.6
  TOP w0.26: 26.35,70.65 26.35,70.53 26.56,70.31 28.77,70.31 28.85,70.4 ; 25.2,71.1 D1_1.6
  TOP w0.4: 19.99,80.01 PX3_1.1 19.99,76.31 25.2,71.1 ; CN1_1.3 28.85,70.4
UNNAMED_1_CAPN4I_I10_A_1_2: length 16.9
  TOP w0.226: 29.35,26.35 D1_2.6
  TOP w0.26: 28.9,25.2 D1_2.6 ; 29.6,28.85 29.69,28.77 29.69,26.56 29.47,26.35 29.35,26.35
  TOP w0.4: 19.99,19.99 PX3_2.1 23.69,19.99 28.9,25.2 ; CN1_2.3 29.6,28.85
UNNAMED_1_CAPN4I_I10_A_1_3: length 16.9
  TOP w0.226: 69.35,56.35 D1_3.6
  TOP w0.26: 68.9,55.2 D1_3.6 ; 69.6,58.86 69.69,58.77 69.69,56.56 69.47,56.35 69.35,56.35
  TOP w0.4: 59.99,49.99 PX3_3.1 63.69,49.99 68.9,55.2 ; CN1_3.3 69.6,58.86
UNNAMED_1_CAPN4I_I10_A_1_4: length 16.9
  TOP w0.226: 69.35,16.35 D1_4.6
  TOP w0.26: 69.6,18.86 69.69,18.77 69.69,16.56 69.47,16.35 69.35,16.35 ; 68.9,15.2 D1_4.6
  TOP w0.4: 68.9,15.2 63.69,9.99 PX3_4.1 59.99,9.99 ; CN1_4.3 69.6,18.86
UNNAMED_1_CAPN4I_I10_A_1_5: length 16.9
  TOP w0.226: 109.35,16.35 D1_5.6
  TOP w0.26: 109.6,18.86 109.69,18.77 109.69,16.56 109.47,16.35 109.35,16.35 ; 108.9,15.2 D1_5.6
  TOP w0.4: 108.9,15.2 103.69,9.99 PX3_5.1 99.99,9.99 ; CN1_5.3 109.6,18.86
UNNAMED_1_CAPN4I_I10_A_1_6: length 16.9
  TOP w0.226: 109.35,56.35 D1_6.6
  TOP w0.26: 109.35,56.35 109.47,56.35 109.69,56.56 109.69,58.77 109.6,58.86 ; 108.9,55.2 D1_6.6
  TOP w0.4: CN1_6.3 109.6,58.86 ; 108.9,55.2 103.69,49.99 PX3_6.1 99.99,49.99
UNNAMED_1_CAPN4I_I10_A_1_7: length 16.9
  TOP w0.226: 153.65,69.35 D1_7.6
  TOP w0.26: 153.65,69.35 153.65,69.47 153.44,69.69 151.23,69.69 151.15,69.6 ; 154.8,68.9 D1_7.6
  TOP w0.4: 160.01,59.99 PX3_7.1 160.01,63.69 154.8,68.9 ; CN1_7.3 151.15,69.6
UNNAMED_1_CAPN4I_I10_A_1_8: length 16.9
  TOP w0.226: 149.35,26.35 D1_8.6
  TOP w0.26: 149.6,28.85 149.69,28.77 149.69,26.56 149.47,26.35 149.35,26.35 ; 148.9,25.2 D1_8.6
  TOP w0.4: 139.99,19.99 PX3_8.1 143.69,19.99 148.9,25.2 ; CN1_8.3 149.6,28.85
UNNAMED_1_CAPN4I_I10_A_1_9: length 16.9
  TOP w0.226: 153.65,109.35 D1_9.6
  TOP w0.26: 153.65,109.35 153.65,109.47 153.44,109.69 151.23,109.69 151.15,109.6 ; 154.8,108.9 D1_9.6
  TOP w0.4: CN1_9.3 151.15,109.6 ; 160.01,99.99 PX3_9.1 160.01,103.69 154.8,108.9
UNNAMED_1_CAPN4I_I10_A_1_10: length 16.9
  TOP w0.226: 150.65,153.65 D1_10.6
  TOP w0.26: 151.1,154.8 D1_10.6 ; 150.65,153.65 150.53,153.65 150.31,153.44 150.31,151.23 150.4,151.15
  TOP w0.4: 151.1,154.8 156.31,160.01 PX3_10.1 160.01,160.01 ; CN1_10.3 150.4,151.15
UNNAMED_1_CAPN4I_I10_A_1_11: length 16.9
  TOP w0.226: 110.65,163.65 D1_11.6
  TOP w0.26: 110.4,161.14 110.31,161.23 110.31,163.44 110.53,163.65 110.65,163.65 ; 111.1,164.8 D1_11.6
  TOP w0.4: 120.01,170.01 PX3_11.1 116.31,170.01 111.1,164.8 ; CN1_11.3 110.4,161.14
UNNAMED_1_CAPN4I_I10_A_1_12: length 16.9
  TOP w0.226: 110.65,123.65 D1_12.6
  TOP w0.26: 111.1,124.8 D1_12.6 ; 110.4,121.14 110.31,121.23 110.31,123.44 110.53,123.65 110.65,123.65
  TOP w0.4: 120.01,130.01 PX3_12.1 116.31,130.01 111.1,124.8 ; CN1_12.3 110.4,121.14
UNNAMED_1_CAPN4I_I10_A_1_13: length 16.9
  TOP w0.226: 70.65,163.65 D1_13.6
  TOP w0.26: 70.4,161.14 70.31,161.23 70.31,163.44 70.53,163.65 70.65,163.65 ; 71.1,164.8 D1_13.6
  TOP w0.4: 71.1,164.8 76.31,170.01 PX3_13.1 80.01,170.01 ; CN1_13.3 70.4,161.14
UNNAMED_1_CAPN4I_I10_A_1_14: length 16.9
  TOP w0.226: 70.65,123.65 D1_14.6
  TOP w0.26: 70.4,121.14 70.31,121.23 70.31,123.44 70.53,123.65 70.65,123.65 ; 71.1,124.8 D1_14.6
  TOP w0.4: CN1_14.3 70.4,121.14 ; 80.01,130.01 PX3_14.1 76.31,130.01 71.1,124.8
UNNAMED_1_CAPN4I_I10_A_1_15: length 16.9
  TOP w0.226: 26.35,110.65 D1_15.6
  TOP w0.26: 28.85,110.4 28.77,110.31 26.56,110.31 26.35,110.53 26.35,110.65 ; 25.2,111.1 D1_15.6
  TOP w0.4: CN1_15.3 28.85,110.4 ; 19.99,120.01 PX3_15.1 19.99,116.31 25.2,111.1
UNNAMED_1_CAPN4I_I10_A_1_16: length 16.9
  TOP w0.226: 30.65,153.65 D1_16.6
  TOP w0.26: 30.65,153.65 30.53,153.65 30.31,153.44 30.31,151.23 30.4,151.15 ; 31.1,154.8 D1_16.6
  TOP w0.4: CN1_16.3 30.4,151.15 ; 31.1,154.8 36.31,160.01 PX3_16.1 40.01,160.01
UNNAMED_1_CAPN4I_I10_A_2: length 20.6
  TOP w0.226: PX4_2.1 19.99,39.99
  TOP w0.26: 25.75,27.65 D1_2.4 28.9,28.7 28.8,28.8
  TOP w0.4: 19.99,39.99 19.99,33.41 25.75,27.65 ; CN1_2.1 28.8,28.8
UNNAMED_1_CAPN4I_I10_A_2_1: length 16.8
  TOP w0.226: D1_1.1 26.35,69.45 26.57,69.67 28.83,69.67 ; PX2_1.1 19.99,60.01
  TOP w0.26: 25.2,68.9 D1_1.1
  TOP w0.4: 28.83,69.67 28.9,69.6 CN1_1.5 ; 19.99,60.01 19.99,63.69 25.2,68.9
UNNAMED_1_CAPN4I_I10_A_2_2: length 16.8
  TOP w0.226: D1_2.1 30.55,26.35 30.33,26.57 30.33,28.83 ; PX2_2.1 39.99,19.99
  TOP w0.26: 31.1,25.2 D1_2.1
  TOP w0.4: 31.1,25.2 36.31,19.99 39.99,19.99 ; 30.33,28.83 30.4,28.9 CN1_2.5
UNNAMED_1_CAPN4I_I10_A_2_3: length 16.8
  TOP w0.226: D1_3.1 70.55,56.35 70.33,56.57 70.33,58.83 ; PX2_3.1 79.99,49.99
  TOP w0.26: 71.1,55.2 D1_3.1
  TOP w0.4: 79.99,49.99 76.31,49.99 71.1,55.2 ; CN1_3.5 70.4,58.9 70.33,58.83
UNNAMED_1_CAPN4I_I10_A_2_4: length 16.8
  TOP w0.226: PX2_4.1 79.99,9.99 ; D1_4.1 70.55,16.35 70.33,16.57 70.33,18.83
  TOP w0.26: 71.1,15.2 D1_4.1
  TOP w0.4: CN1_4.5 70.4,18.9 70.33,18.83 ; 79.99,9.99 76.31,9.99 71.1,15.2
UNNAMED_1_CAPN4I_I10_A_2_5: length 16.8
  TOP w0.226: 110.33,18.83 110.33,16.57 110.55,16.35 D1_5.1 ; PX2_5.1 119.99,9.99
  TOP w0.26: 111.1,15.2 D1_5.1
  TOP w0.4: 111.1,15.2 116.31,9.99 119.99,9.99 ; CN1_5.5 110.4,18.9 110.33,18.83
UNNAMED_1_CAPN4I_I10_A_2_6: length 16.8
  TOP w0.226: 110.33,58.83 110.33,56.57 110.55,56.35 D1_6.1 ; PX2_6.1 119.99,49.99
  TOP w0.26: 111.1,55.2 D1_6.1
  TOP w0.4: CN1_6.5 110.4,58.9 110.33,58.83 ; 119.99,49.99 116.31,49.99 111.1,55.2
UNNAMED_1_CAPN4I_I10_A_2_7: length 16.8
  TOP w0.226: D1_7.1 153.65,70.55 153.43,70.33 151.17,70.33 ; PX2_7.1 160.01,79.99
  TOP w0.26: 154.8,71.1 D1_7.1
  TOP w0.4: 160.01,79.99 160.01,76.31 154.8,71.1 ; 151.17,70.33 151.1,70.4 CN1_7.5
UNNAMED_1_CAPN4I_I10_A_2_8: length 16.8
  TOP w0.226: 150.33,28.83 150.33,26.57 150.55,26.35 D1_8.1 ; PX2_8.1 159.99,19.99
  TOP w0.26: 151.1,25.2 D1_8.1
  TOP w0.4: CN1_8.5 150.4,28.9 150.33,28.83 ; 151.1,25.2 156.31,19.99 159.99,19.99
UNNAMED_1_CAPN4I_I10_A_2_9: length 16.8
  TOP w0.226: D1_9.1 153.65,110.55 153.43,110.33 151.17,110.33 ; PX2_9.1 160.01,119.99
  TOP w0.26: 154.8,111.1 D1_9.1
  TOP w0.4: 151.17,110.33 151.1,110.4 CN1_9.5 ; 160.01,119.99 160.01,116.31 154.8,111.1
UNNAMED_1_CAPN4I_I10_A_2_10: length 16.8
  TOP w0.226: 149.67,151.17 149.67,153.43 149.45,153.65 D1_10.1 ; PX2_10.1 140.01,160.01
  TOP w0.26: 148.9,154.8 D1_10.1
  TOP w0.4: CN1_10.5 149.6,151.1 149.67,151.17 ; 148.9,154.8 143.69,160.01 140.01,160.01
UNNAMED_1_CAPN4I_I10_A_2_11: length 16.8
  TOP w0.226: PX2_11.1 100.01,170.01 ; D1_11.1 109.45,163.65 109.67,163.43 109.67,161.17
  TOP w0.26: 108.9,164.8 D1_11.1
  TOP w0.4: 100.01,170.01 103.69,170.01 108.9,164.8 ; CN1_11.5 109.6,161.1 109.67,161.17
UNNAMED_1_CAPN4I_I10_A_2_12: length 16.8
  TOP w0.226: D1_12.1 109.45,123.65 109.67,123.43 109.67,121.17 ; PX2_12.1 100.01,130.01
  TOP w0.26: 108.9,124.8 D1_12.1
  TOP w0.4: 109.67,121.17 109.6,121.1 CN1_12.5 ; 100.01,130.01 103.69,130.01 108.9,124.8
UNNAMED_1_CAPN4I_I10_A_2_13: length 16.8
  TOP w0.226: PX2_13.1 60.01,170.01 ; D1_13.1 69.45,163.65 69.67,163.43 69.67,161.17
  TOP w0.26: 68.9,164.8 D1_13.1
  TOP w0.4: 68.9,164.8 63.69,170.01 60.01,170.01 ; CN1_13.5 69.6,161.1 69.67,161.17
UNNAMED_1_CAPN4I_I10_A_2_14: length 16.8
  TOP w0.226: 69.67,121.17 69.67,123.43 69.45,123.65 D1_14.1 ; PX2_14.1 60.01,130.01
  TOP w0.26: 68.9,124.8 D1_14.1
  TOP w0.4: CN1_14.5 69.6,121.1 69.67,121.17 ; 60.01,130.01 63.69,130.01 68.9,124.8
UNNAMED_1_CAPN4I_I10_A_2_15: length 16.8
  TOP w0.226: D1_15.1 26.35,109.45 26.57,109.67 28.83,109.67 ; PX2_15.1 19.99,100.01
  TOP w0.26: 25.2,108.9 D1_15.1
  TOP w0.4: 19.99,100.01 19.99,103.69 25.2,108.9 ; 28.83,109.67 28.9,109.6 CN1_15.5
UNNAMED_1_CAPN4I_I10_A_2_16: length 16.8
  TOP w0.226: PX2_16.1 20.01,160.01 ; D1_16.1 29.45,153.65 29.67,153.43 29.67,151.17
  TOP w0.26: 28.9,154.8 D1_16.1
  TOP w0.4: 28.9,154.8 23.69,160.01 20.01,160.01 ; 29.67,151.17 29.6,151.1 CN1_16.5
UNNAMED_1_CAPN4I_I10_A_3: length 20.6
  TOP w0.226: PX4_3.1 59.99,69.99
  TOP w0.26: 68.8,58.8 68.9,58.7 D1_3.4 65.75,57.65
  TOP w0.4: 65.75,57.65 59.99,63.41 59.99,69.99 ; CN1_3.1 68.8,58.8
UNNAMED_1_CAPN4I_I10_A_3_1: length 20.7
  TOP w0.226: PX1_1.1 39.99,60.01
  TOP w0.26: 28.7,68.8 28.6,68.9 D1_1.3 27.65,65.55
  TOP w0.4: 27.65,65.55 33.19,60.01 39.99,60.01 ; CN1_1.7 28.7,68.8
UNNAMED_1_CAPN4I_I10_A_3_2: length 20.7
  TOP w0.226: PX1_2.1 39.99,39.99
  TOP w0.26: 34.45,27.65 D1_2.3 31.1,28.6 31.2,28.7
  TOP w0.4: CN1_2.7 31.2,28.7 ; 39.99,39.99 39.99,33.19 34.45,27.65
UNNAMED_1_CAPN4I_I10_A_3_3: length 20.7
  TOP w0.226: PX1_3.1 79.99,69.99
  TOP w0.26: 71.2,58.7 71.1,58.6 D1_3.3 74.45,57.65
  TOP w0.4: CN1_3.7 71.2,58.7 ; 79.99,69.99 79.99,63.19 74.45,57.65
UNNAMED_1_CAPN4I_I10_A_3_4: length 20.7
  TOP w0.226: PX1_4.1 79.99,29.99
  TOP w0.26: 71.2,18.7 71.1,18.6 D1_4.3 74.45,17.65
  TOP w0.4: CN1_4.7 71.2,18.7 ; 74.45,17.65 79.99,23.19 79.99,29.99
UNNAMED_1_CAPN4I_I10_A_3_5: length 20.7
  TOP w0.226: PX1_5.1 119.99,29.99
  TOP w0.26: 114.45,17.65 D1_5.3 111.1,18.6 111.2,18.7
  TOP w0.4: 114.45,17.65 119.99,23.19 119.99,29.99 ; CN1_5.7 111.2,18.7
UNNAMED_1_CAPN4I_I10_A_3_6: length 20.7
  TOP w0.226: PX1_6.1 119.99,69.99
  TOP w0.26: 111.2,58.7 111.1,58.6 D1_6.3 114.45,57.65
  TOP w0.4: 119.99,69.99 119.99,63.19 114.45,57.65 ; CN1_6.7 111.2,58.7
UNNAMED_1_CAPN4I_I10_A_3_7: length 20.7
  TOP w0.226: PX1_7.1 140.01,79.99
  TOP w0.26: 152.35,74.45 D1_7.3 151.4,71.1 151.3,71.2
  TOP w0.4: CN1_7.7 151.3,71.2 ; 152.35,74.45 146.81,79.99 140.01,79.99
UNNAMED_1_CAPN4I_I10_A_3_8: length 20.7
  TOP w0.226: PX1_8.1 159.99,39.99
  TOP w0.26: 154.45,27.65 D1_8.3 151.1,28.6 151.2,28.7
  TOP w0.4: 154.45,27.65 159.99,33.19 159.99,39.99 ; CN1_8.7 151.2,28.7
UNNAMED_1_CAPN4I_I10_A_3_9: length 20.7
  TOP w0.226: PX1_9.1 140.01,119.99
  TOP w0.26: 151.3,111.2 151.4,111.1 D1_9.3 152.35,114.45
  TOP w0.4: CN1_9.7 151.3,111.2 ; 140.01,119.99 146.81,119.99 152.35,114.45
UNNAMED_1_CAPN4I_I10_A_3_10: length 20.7
  TOP w0.226: PX1_10.1 140.01,140.01
  TOP w0.26: 148.8,151.3 148.9,151.4 D1_10.3 145.55,152.35
  TOP w0.4: 145.55,152.35 140.01,146.81 140.01,140.01 ; CN1_10.7 148.8,151.3
UNNAMED_1_CAPN4I_I10_A_3_11: length 20.7
  TOP w0.226: PX1_11.1 100.01,150.01
  TOP w0.26: 108.8,161.3 108.9,161.4 D1_11.3 105.55,162.35
  TOP w0.4: 105.55,162.35 100.01,156.81 100.01,150.01 ; CN1_11.7 108.8,161.3
UNNAMED_1_CAPN4I_I10_A_3_12: length 20.7
  TOP w0.226: PX1_12.1 100.01,110.01
  TOP w0.26: 108.8,121.3 108.9,121.4 D1_12.3 105.55,122.35
  TOP w0.4: 105.55,122.35 100.01,116.81 100.01,110.01 ; CN1_12.7 108.8,121.3
UNNAMED_1_CAPN4I_I10_A_3_13: length 20.7
  TOP w0.226: PX1_13.1 60.01,150.01
  TOP w0.26: 65.55,162.35 D1_13.3 68.9,161.4 68.8,161.3
  TOP w0.4: 65.55,162.35 60.01,156.81 60.01,150.01 ; CN1_13.7 68.8,161.3
UNNAMED_1_CAPN4I_I10_A_3_14: length 20.7
  TOP w0.226: PX1_14.1 60.01,110.01
  TOP w0.26: 68.8,121.3 68.9,121.4 D1_14.3 65.55,122.35
  TOP w0.4: 65.55,122.35 60.01,116.81 60.01,110.01 ; CN1_14.7 68.8,121.3
UNNAMED_1_CAPN4I_I10_A_3_15: length 20.7
  TOP w0.226: PX1_15.1 39.99,100.01
  TOP w0.26: 27.65,105.55 D1_15.3 28.6,108.9 28.7,108.8
  TOP w0.4: 39.99,100.01 33.19,100.01 27.65,105.55 ; CN1_15.7 28.7,108.8
UNNAMED_1_CAPN4I_I10_A_3_16: length 20.7
  TOP w0.226: PX1_16.1 20.01,140.01
  TOP w0.26: 28.8,151.3 28.9,151.4 D1_16.3 25.55,152.35
  TOP w0.4: CN1_16.7 28.8,151.3 ; 25.55,152.35 20.01,146.81 20.01,140.01
UNNAMED_1_CAPN4I_I10_A_4: length 20.6
  TOP w0.226: PX4_4.1 59.99,29.99
  TOP w0.26: 65.75,17.65 D1_4.4 68.9,18.7 68.8,18.8
  TOP w0.4: CN1_4.1 68.8,18.8 ; 65.75,17.65 59.99,23.41 59.99,29.99
UNNAMED_1_CAPN4I_I10_A_5: length 20.6
  TOP w0.226: PX4_5.1 99.99,29.99
  TOP w0.26: 105.75,17.65 D1_5.4 108.9,18.7 108.8,18.8
  TOP w0.4: 105.75,17.65 99.99,23.41 99.99,29.99 ; CN1_5.1 108.8,18.8
UNNAMED_1_CAPN4I_I10_A_6: length 20.6
  TOP w0.226: PX4_6.1 99.99,69.99
  TOP w0.26: 108.8,58.8 108.9,58.7 D1_6.4 105.75,57.65
  TOP w0.4: 105.75,57.65 99.99,63.41 99.99,69.99 ; CN1_6.1 108.8,58.8
UNNAMED_1_CAPN4I_I10_A_7: length 20.6
  TOP w0.226: PX4_7.1 140.01,59.99
  TOP w0.26: 152.35,65.75 D1_7.4 151.3,68.9 151.2,68.8
  TOP w0.4: CN1_7.1 151.2,68.8 ; 140.01,59.99 146.59,59.99 152.35,65.75
UNNAMED_1_CAPN4I_I10_A_8: length 20.6
  TOP w0.226: PX4_8.1 139.99,39.99
  TOP w0.26: 145.75,27.65 D1_8.4 148.9,28.7 148.8,28.8
  TOP w0.4: CN1_8.1 148.8,28.8 ; 145.75,27.65 139.99,33.41 139.99,39.99
UNNAMED_1_CAPN4I_I10_A_9: length 20.6
  TOP w0.226: PX4_9.1 140.01,99.99
  TOP w0.26: 151.2,108.8 151.3,108.9 D1_9.4 152.35,105.75
  TOP w0.4: 152.35,105.75 146.59,99.99 140.01,99.99 ; CN1_9.1 151.2,108.8
UNNAMED_1_CAPN4I_I10_A_10: length 20.6
  TOP w0.226: PX4_10.1 160.01,140.01
  TOP w0.26: 151.2,151.2 151.1,151.3 D1_10.4 154.25,152.35
  TOP w0.4: CN1_10.1 151.2,151.2 ; 154.25,152.35 160.01,146.59 160.01,140.01
UNNAMED_1_CAPN4I_I10_A_11: length 20.6
  TOP w0.226: PX4_11.1 120.01,150.01
  TOP w0.26: 114.25,162.35 D1_11.4 111.1,161.3 111.2,161.2
  TOP w0.4: 114.25,162.35 120.01,156.59 120.01,150.01 ; CN1_11.1 111.2,161.2
UNNAMED_1_CAPN4I_I10_A_12: length 20.6
  TOP w0.226: PX4_12.1 120.01,110.01
  TOP w0.26: 114.25,122.35 D1_12.4 111.1,121.3 111.2,121.2
  TOP w0.4: 120.01,110.01 120.01,116.59 114.25,122.35 ; CN1_12.1 111.2,121.2
UNNAMED_1_CAPN4I_I10_A_13: length 20.6
  TOP w0.226: PX4_13.1 80.01,150.01
  TOP w0.26: 71.2,161.2 71.1,161.3 D1_13.4 74.25,162.35
  TOP w0.4: 80.01,150.01 80.01,156.59 74.25,162.35 ; CN1_13.1 71.2,161.2
UNNAMED_1_CAPN4I_I10_A_14: length 20.6
  TOP w0.226: PX4_14.1 80.01,110.01
  TOP w0.26: 71.2,121.2 71.1,121.3 D1_14.4 74.25,122.35
  TOP w0.4: 74.25,122.35 80.01,116.59 80.01,110.01 ; CN1_14.1 71.2,121.2
UNNAMED_1_CAPN4I_I10_A_15: length 20.6
  TOP w0.226: PX4_15.1 39.99,120.01
  TOP w0.26: 28.8,111.2 28.7,111.1 D1_15.4 27.65,114.25
  TOP w0.4: CN1_15.1 28.8,111.2 ; 27.65,114.25 33.41,120.01 39.99,120.01
UNNAMED_1_CAPN4I_I10_A_16: length 20.6
  TOP w0.226: PX4_16.1 40.01,140.01
  TOP w0.26: 34.25,152.35 D1_16.4 31.1,151.3 31.2,151.2
  TOP w0.4: 40.01,140.01 40.01,146.59 34.25,152.35 ; CN1_16.1 31.2,151.2

## Text on the board
User.Comments: pc049a_lemo_db - daughter-board for single maroc readout | 17/Mar/14 | D.Cussans | 14
